# Altium PCB PCB1.PcbDoc
Units mm, origin at the board's own origin, x right, y up, seen from the top; angles counter-clockwise.
Board outline 36.7 x 69.47 mm, 2 copper layers (Top Layer, Bottom Layer); 4 components, 10 nets, 39 pads, 0 vias.
Unrouted connection lines stored in the file: 1.
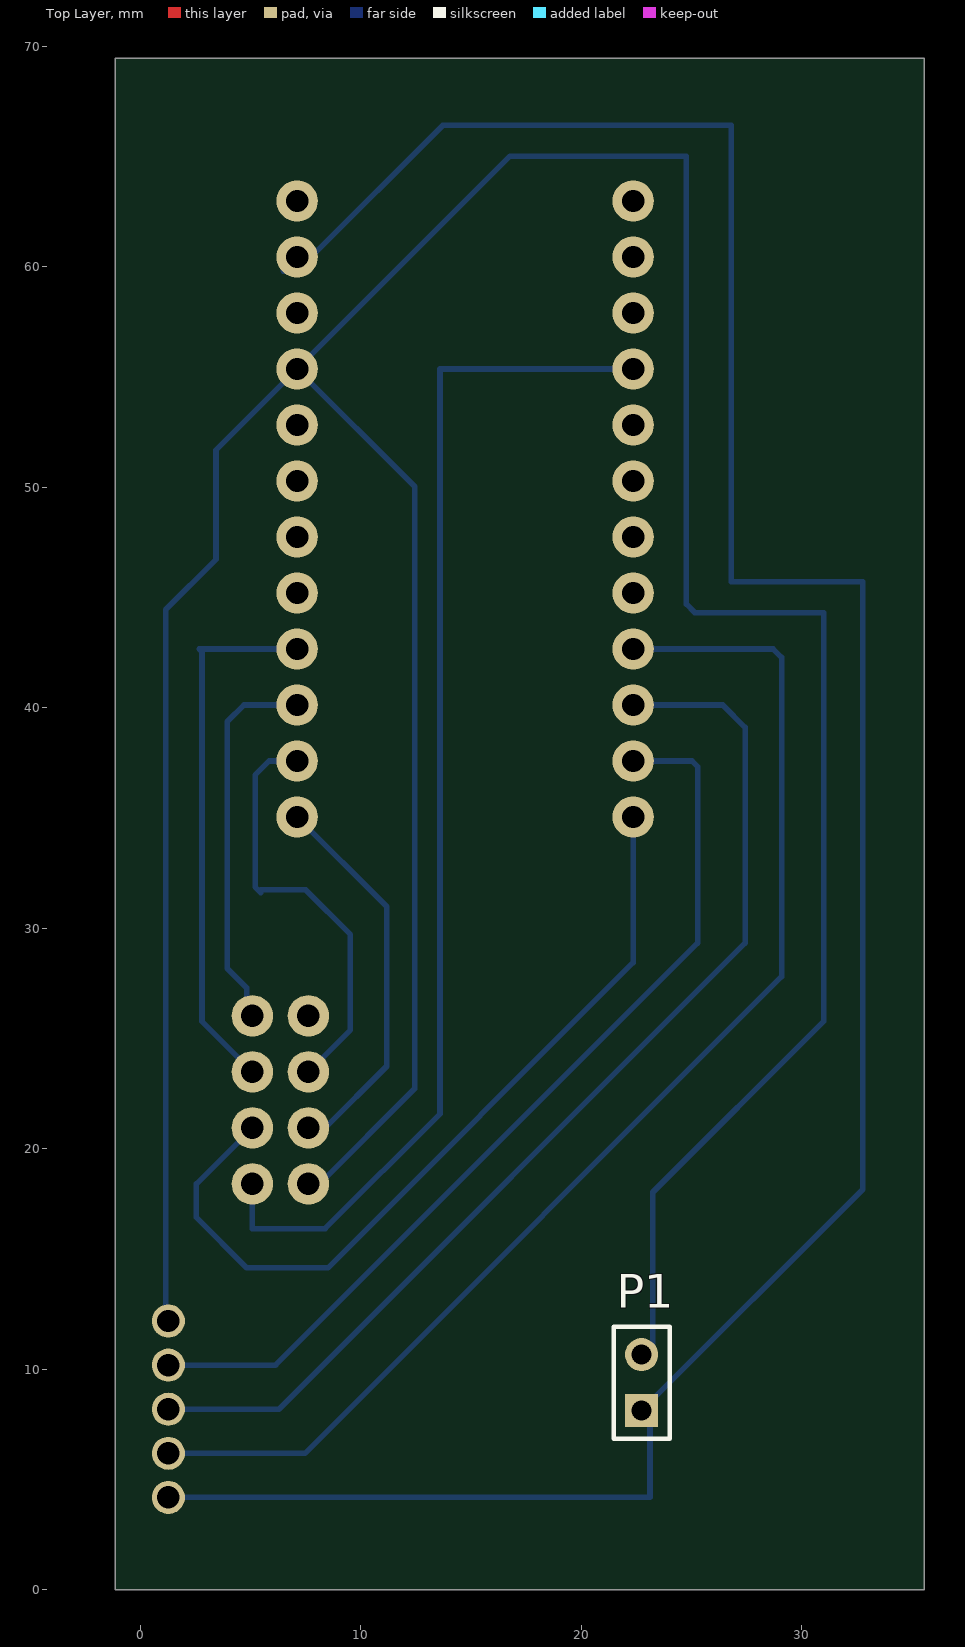
[diagram p0: Top Layer view]
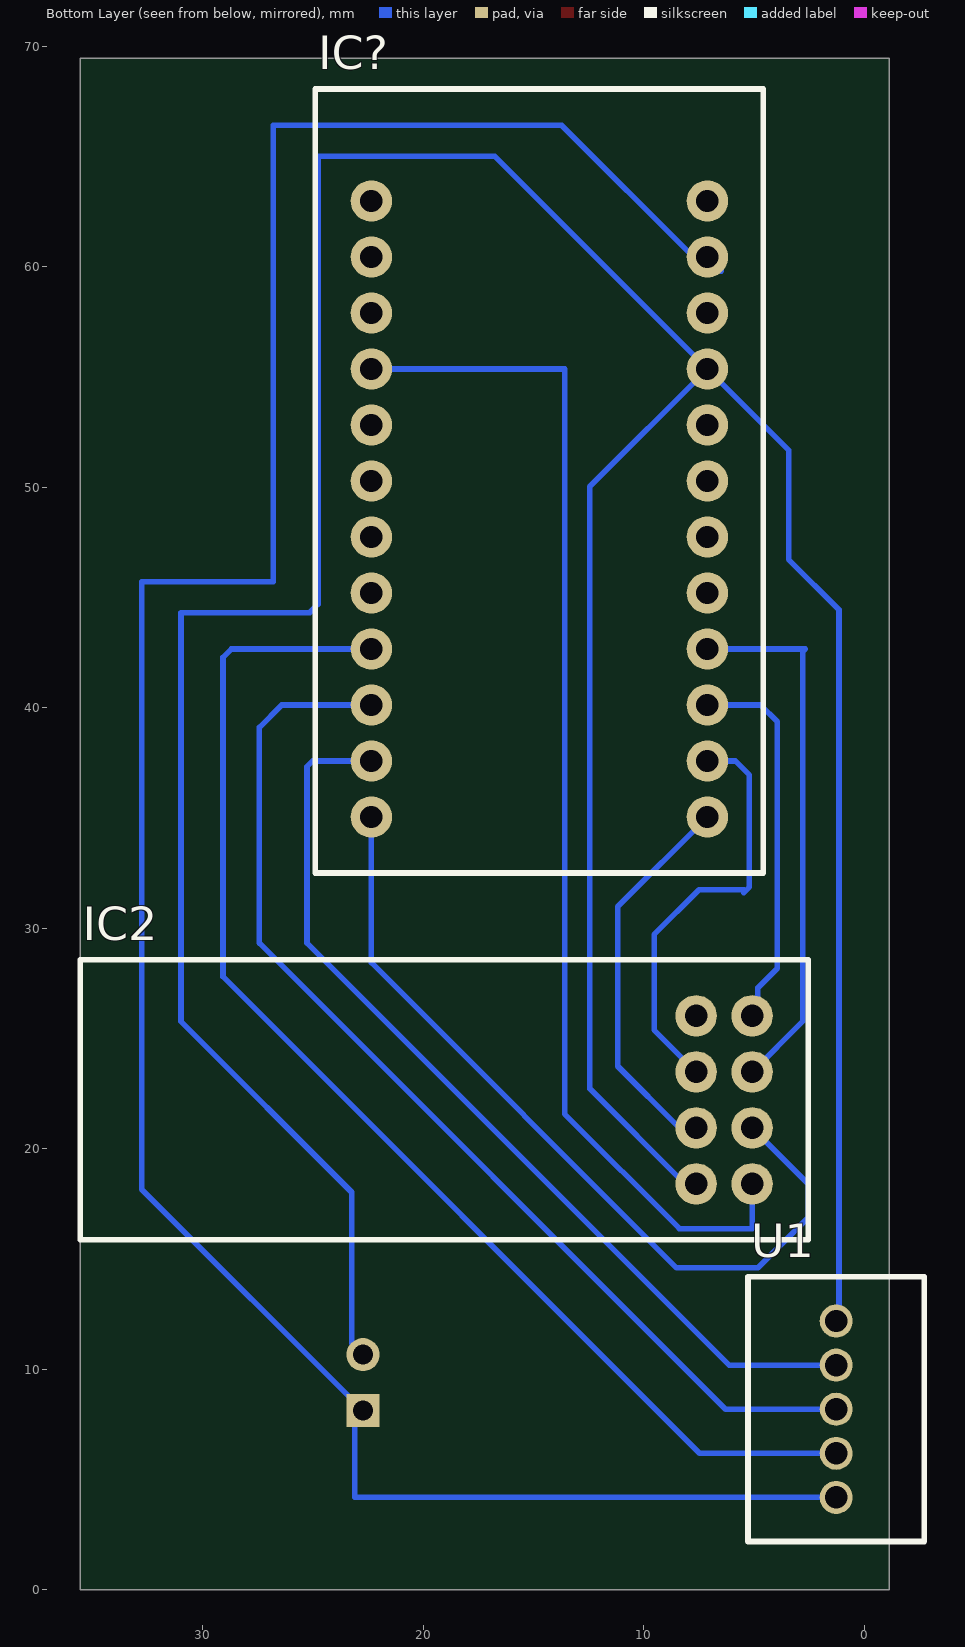
[diagram p1: Bottom Layer view, seen from below]

## Layer stack, top to bottom
Top Solder: solder mask 0.0102, Solder Resist, Dk 3.5
Top Layer: signal copper 0.0356
Dielectric 1: dielectric 0.32, FR-4, Dk 4.8
Bottom Layer: signal copper 0.0356
Bottom Solder: solder mask 0.0102, Solder Resist, Dk 3.5

## Board outline
-1.143,0 35.56,0 35.56,69.469 -1.143,69.469

## Design rules (kind name [scope] priority, off if disabled: settings)
Clearance [All] p1: gap=0.254
PolygonConnect [All] p1: connectstyle=Relief reliefconductorwidth=0.254 reliefentries=4 polygonreliefangle="90 Angle" airgapwidth=0.254
RoomDefinition controller [InComponentClass('controller')] p1: confinementstyle=ConfineIn formatcopy=TRUE lockcomponents=FALSE outline 35.56,0 35.56,69.469 -1.143,69.469 -1.143,0
RoutingVias [All] p1: holewidth=0.711 width=1.27 viastyle="Through Hole" minholewidth=0.711 minwidth=1.27 maxholewidth=0.711 maxwidth=1.27
SolderMaskExpansion [All] p1: expansion=0.102
Width [All] p1: maxlimit=0.254 minlimit=0.254 preferedwidth=0.254
30 further rules are at their usual default settings.

## Classes and differential pairs
component class controller: P1 U1

## Components (designator, comment, footprint, x,y, rotation, side; value= is the part's Value field where it differs from the comment)
IC2 "NRF2401" nrf2401 5.08,18.415 r90 bottom
IC? "Arduino" "Arduino Pro Mini" 22.352,35.052 r180 bottom
P1 "Header 2" HDR1X2 22.733,8.128 r90 top
U1 "Component_1" snescontroller 1.27,4.191 r90 bottom

## Footprints (in the part's own frame and the unit in brackets; to place one, negate y for a bottom-side part, rotate by r counter-clockwise, add the part's x,y. Pads: shape width x height; smd on the part's side, far side on the other; paste and mask are expansions set on the pad)
"Arduino Pro Mini" [mil]
  round 74 hole 40: 2(0,700) 3(0,600) 4(0,500) 5(0,400) 6(0,300) 7(0,200) 8(0,100) 9(0,0) 10(600,0) 11(600,100) 12(600,200) 13(600,300) A0(600,400) A1(600,500) A2(600,600) A3(600,700) GND1(0,800) GND2(600,1000) RAW(600,1100) RST1(0,900) RST2(600,900) RXT(0,1000) TXO(0,1100) VCC(600,800)
  silkscreen extent -100,-100 700,1300
HDR1X2 [mm] "Connector; Header; 2 Position"
  rect 1.5x1.5 hole 0.9: 1(0,0)
  round 1.5 hole 0.9: 2(2.54,0)
  silkscreen extent -1.27,-1.27 3.81,1.27
nrf2401 [mil]
  round 74 hole 40: CE(100,0) CSN(100,100) GND(0,0) IRQ(300,100) MISO(300,0) MOSI(200,100) SCK(200,0) VCC(0,100)
  silkscreen extent -100,-100 400,1200
snescontroller [mm] "snes controller"
  round 1.5 hole 1.016: 1(0,0) 2(2,0) 3(4,0) 4(6,0) 5(8,0)
  silkscreen extent -2,-4 10,4

## Part data
IC2: "Nrf2401 Wireless Transceiver"
IC?: "Arduino Pro Mini"
P1: "Header, 2-Pin"
U1: "snes  controller"

## Nets (pads, with @x,y where several pads share a name; then routed paths per layer and width w, separated by ;. In a path a pad name is that pad's centre, name@x,y a point inside that pad or via, vN(x,y) a via of type N, cw(c..) or ccw(c..) an arc to the next point about the centre after c; other vN are vias at no path point)
GND: IC2.GND IC?.GND1 IC?.GND2 P1.1 U1.1 | length 173.6
  Bottom Layer w0.254: U1.1 23.114,4.191 23.114,7.747 P1.1 32.766,18.161 32.766,45.72 26.797,45.72 26.797,66.421 13.716,66.421 7.747,60.452 IC?.GND2 IC?.GND2@6.477,59.817 ; IC2.GND@4.826,19.05 IC2.GND@5.461,18.415 ; IC2.GND 5.08,16.383 8.382,16.383 13.589,21.59 13.589,55.372 IC?.GND1
NetIC2_CE: IC2.CE IC?.9 | length 38.2
  Bottom Layer w0.254: IC2.CE 2.54,18.415 2.54,16.891 4.826,14.605 8.509,14.605 22.352,28.448 IC?.9
NetIC2_CSN: IC2.CSN IC?.10 | length 17.7
  Bottom Layer w0.254: IC?.10 11.176,30.988 11.176,23.749 8.382,20.955 IC2.CSN
NetIC2_MISO: IC2.MISO IC?.12 | length 17.3
  Bottom Layer w0.254: IC2.MISO 4.826,26.289 4.826,27.305 3.937,28.194 3.937,39.37 4.699,40.132 IC?.12
NetIC2_MOSI: IC2.MOSI IC?.11 | length 19.7
  Bottom Layer w0.254: IC?.11 5.842,37.592 5.207,36.957 5.207,31.877 5.461,31.623 5.461,31.75 7.493,31.75 9.525,29.718 9.525,25.4 IC2.MOSI
NetIC2_SCK: IC2.SCK IC?.13 | length 24.6
  Bottom Layer w0.254: IC2.SCK 2.794,25.781 2.794,42.545 2.667,42.672 IC?.13
NetIC?_6: IC?.6 U1.2 | length 58.1
  Bottom Layer w0.254: U1.2 7.461,6.191 29.083,27.813 29.083,42.291 28.702,42.672 IC?.6
NetIC?_7: IC?.7 U1.3 | length 50.2
  Bottom Layer w0.254: U1.3 6.286,8.191 27.432,29.337 27.432,39.116 26.416,40.132 IC?.7
NetIC?_8: IC?.8 U1.4 | length 43
  Bottom Layer w0.254: U1.4 6.127,10.191 25.273,29.337 25.273,37.338 25.019,37.592 IC?.8
VCC: IC2.VCC IC?.VCC P1.2 U1.5 | length 172.4
  Bottom Layer w0.254: U1.5@1.143,12.318 1.143,44.45 3.429,46.736 3.429,51.689 IC?.VCC ; IC2.VCC 8.128,18.415 12.446,22.733 12.446,50.038 IC?.VCC ; P1.2 23.241,11.176 23.241,18.034 30.988,25.781 30.988,44.323 25.146,44.323 24.765,44.704 24.765,65.024 16.764,65.024 IC?.VCC
pads on no net: IC2.IRQ IC?.2 IC?.3 IC?.4 IC?.5 IC?.A0 IC?.A1 IC?.A2 IC?.A3 IC?.RAW IC?.RST1 IC?.RST2 IC?.RXT IC?.TXO